# Altium PCB LinkIt Smart 7688 Duo.PcbDoc (part 2 of 3)
Units mil, origin at the board's own origin, x right, y up, seen from the top; angles counter-clockwise.
Board outline 2393.7 x 1023.62 mil, 4 copper layers (Top Layer, Mid Layer 1, Mid Layer 2, Bottom Layer), stack 40 mil thick; 184 components, 153 nets, 759 pads, 3026 vias.
Unrouted connection lines stored in the file: 1.
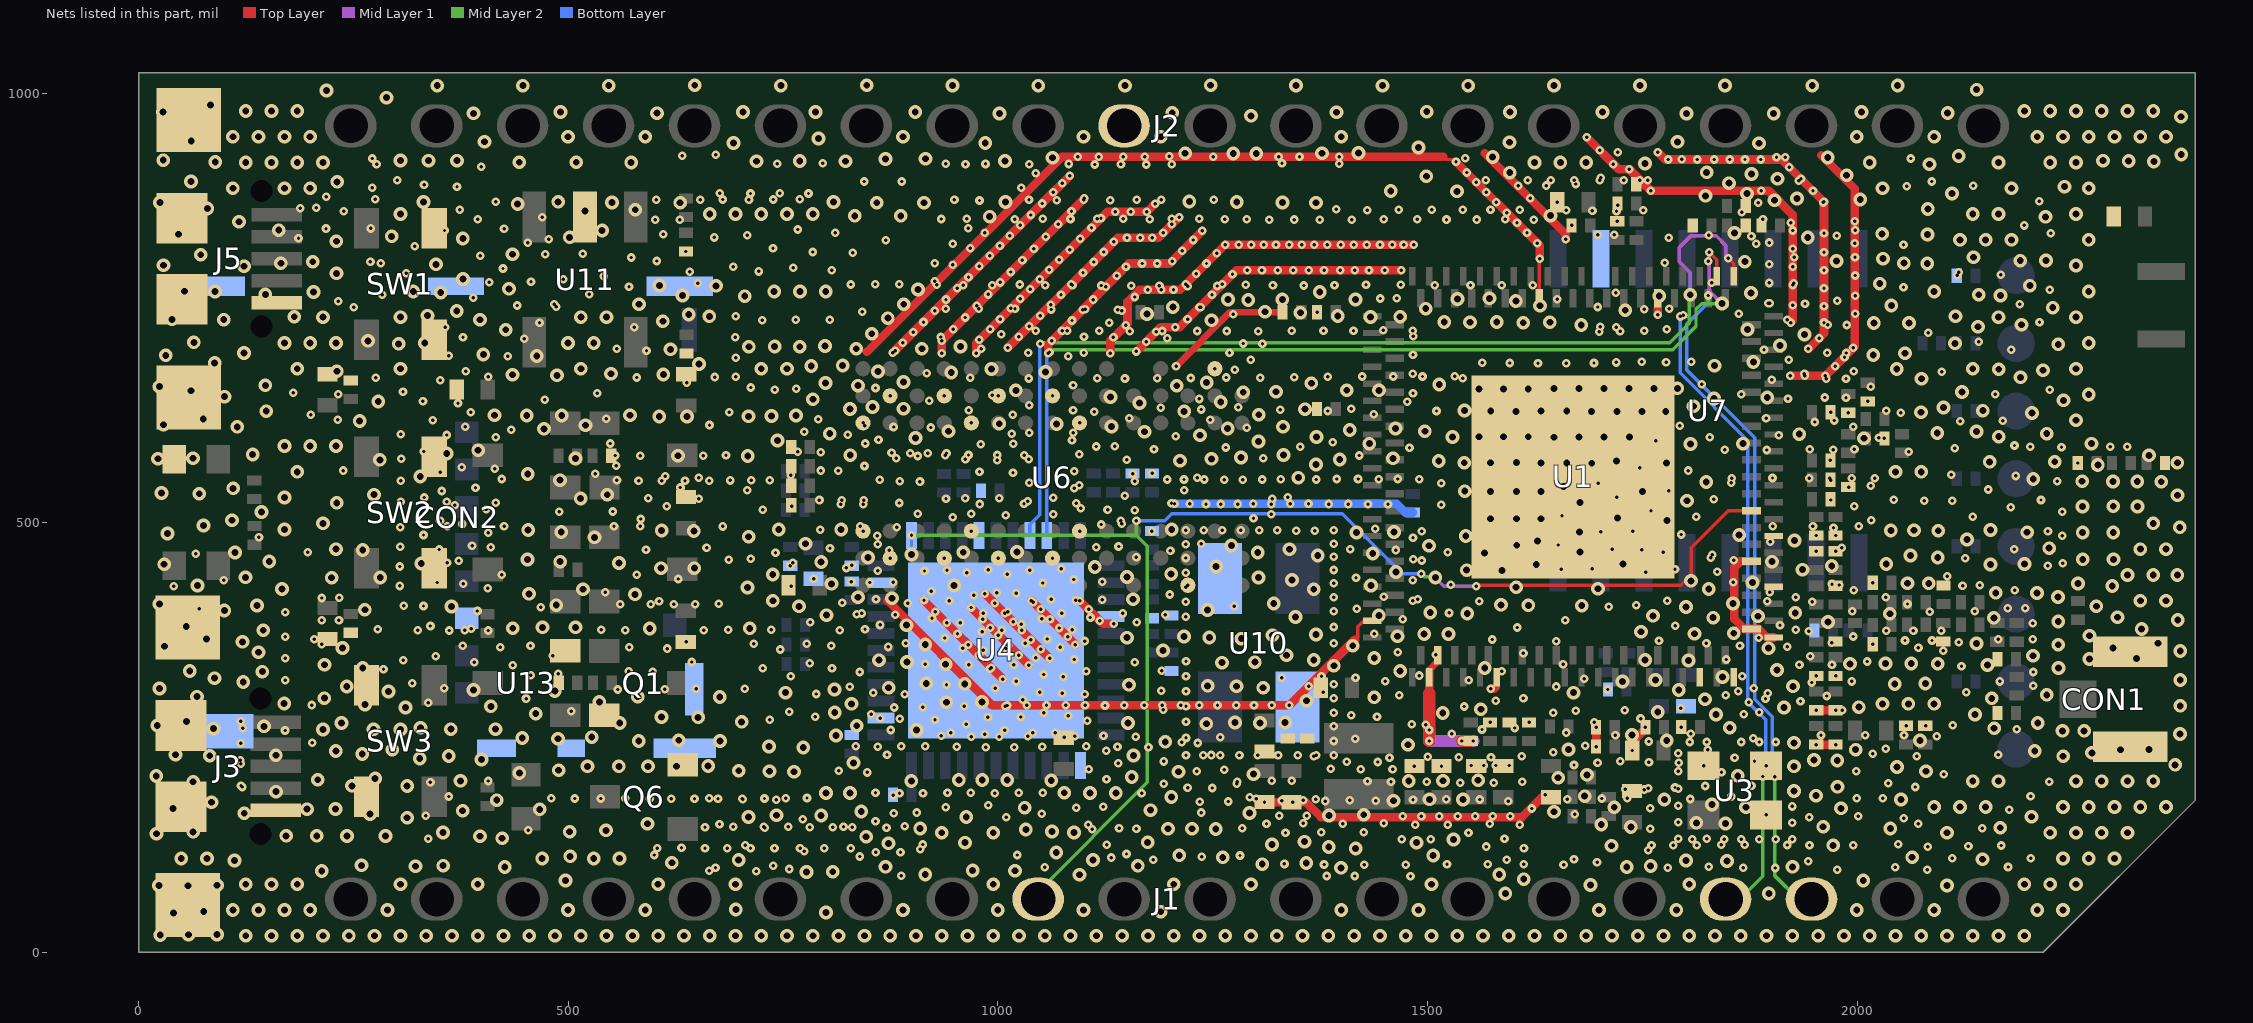
[diagram p4: the nets of this part, all layers, seen from the top]

## Via types
v1: diameter 10, hole 4, Mid Layer 2 to Bottom Layer, tented bottom, 916 vias
v2: diameter 10, hole 4, Top Layer to Mid Layer 1, tented top, 915 vias
v3: diameter 16, hole 8, Top Layer to Bottom Layer, tented both sides, 776 vias
v4: diameter 16, hole 8, Mid Layer 1 to Mid Layer 2, 419 vias

## Nets (pads, with @x,y where several pads share a name; then routed paths per layer and width w, separated by ;. In a path a pad name is that pad's centre, name@x,y a point inside that pad or via, vN(x,y) a via of type N, cw(c..) or ccw(c..) an arc to the next point about the centre after c; other vN are vias at no path point) (continued)
GND: C1.2 C2.2 C3.2 C4.2 C5.2 C7.2 C8.2 C9.2 C10.2 C11.2 C12.2 C13.1 C14.2 C15.1 C16.2 C17.2 C18.2 C19.2 C20.2 C21.2 C22.1 C23.2 C24.2 C25.2 C26.2 C27.2 C28.2 C29.2 C30.2 C33.2 C34.2 C39.2 C47.2 C49.2 C51.2 C52.2 C53.2 C54.2 C55.2 C56.2 C57.2 C58.2 C59.2 C60.2 C71.2 C72.2 C75.2 C76.2 C77.2 C78.2 C84.2 C85.2 C86.2 C87.2 C88.2 C89.2 C90.2 C91.2 C92.2 C93.2 C94.2 C95.2 C96.2 C97.2 C101.2 C102.2 C104.2 C105.2 C108.2 C109.2 C110.2 C179.2 C182.2 C183.2 C184.2 C189.2 C190.2 C191.1 C192.1 C193.2 C195.2 C197.2 C337.2 CON1.2 CON1.3 CON2.6 CON2.11 CON2.14 D2.2 J2.11 J3.5 J3.6 J3.7 J3.8 J3.9 J5.5 J5.6 J5.7 J5.8 J5.9 L32.1 Q1.3 Q6.3 R2.1 R3.1 R7.1 R8.2 R11.2 R13.1 R31.2 R32.2 R39.2 R52.1 R78.2 R83.1 R88.1 R89.1 R96.1 RC1.2 SW1.1 SW1.2 SW2.1 SW2.2 SW3.1 SW3.2 U1.1 U1.2 U1.7 U1.10 U1.13 U1.49 U1.63 U1.115 U1.120 U1.121 U1.128 U1.152 U1.156 U1.157 U3.2 U3.3 U3.4 U4.5 U4.15 U4.23 U4.35 U4.43 U4.45 U6.A3 U6.A7 U6.B2 U6.B8 U6.D2 U6.D8 U6.E3 U6.E7 U6.F2 U6.F8 U6.H2 U6.H8 U6.J3 U6.J7 U6.N1 U6.P9 U7.10 U10.2 U10.4 U11.2 U13.2 | length 6667.2
  Top Layer w4: v3@1415.75,363.58 1418.83,366.67 1418.83,379.07 U1.115@1425.79,386.02 ; 1521.16,922.62 1530.33,922.62 v2(1533.14,919.81) ; U1.63@1630.02,765.75 1630.02,806.8 v2(1630.51,807.28)
  Top Layer w8: v2(1207.28,681.89) 1270.28,744.88 C58.2@1331.3,744.88 ; U1.120@1501.58,328.01 1511.81,338.24 U1.121@1511.81,345.67
  Top Layer w10: 847.46,698.66 1074.43,925.62 v2(1093.11,925.62) v2(1397.24,925.62) 1518.16,925.62 ; 871.34,409.27 993.19,287.43 v2(1339.24,287.43) 1415.39,363.58 v3@1415.75,363.58 ; v2(877.56,697.64) v2(901.38,721.46) v2(926.57,746.65) v2(952.76,772.83) v2(978.35,798.43) v2(1002.36,822.44) v2(1025.98,846.06) v2(1064.37,884.45) v2(1075,895.08) v2(1083.46,903.54) ; v2(913.98,409.44) v2(1005.51,317.91) ; v2(934.74,696.95) v2(934.74,711.71) v2(1100.59,877.56) ; v2(968.81,401.27) v2(1036.02,334.06) ; v2(974.65,696.95) 974.65,709.01 1127.24,861.6 v2(1173.41,861.6) v2(1183.07,871.26) ; v2(984.76,417.4) v2(1060.24,341.93) ; v2(1011.51,703.44) v2(1111.42,803.35) 1139.67,831.6 1186.91,831.6 v2(1210.83,855.51) ; v2(1038.96,409.27) v2(1090.16,358.07) ; v2(1058.44,696.95) 1058.44,707.46 v2(1138.39,787.4) 1152.58,801.6 1199.83,801.6 v2(1237.8,839.57) ; v2(1094.96,409.27) 1121.95,382.28 v2(1134.84,382.28) ; v2(1130.93,696.95) 1130.93,711.69 1150.81,731.57 1150.81,756.85 1164.81,770.84 1211.98,770.84 v2(1264.76,823.62) v2(1484.06,823.62) ; v2(1161.18,699.22) 1189.32,727.36 1211.36,727.36 1277.62,793.62 v2(1469.45,793.62) ; C90.2@1310.24,174.8 1310.35,174.69 C89.2@1341.75,174.69 1358.64,174.69 1376,157.34 1609.9,157.34 1633.07,180.51 C72.2@1643.7,180.51 ; 1501.77,305.32 U1.120@1501.97,319.88 U1.120@1501.97,327.63 ; v2(1533.14,919.81) 1630.51,822.44 v2(1630.51,807.28) ; 1566.34,930.12 1660.63,835.83 v2(1660.63,829.92) ; v2(1573.62,306.69) 1577.36,306.69 1579.33,308.66 ; v2(1685.12,948.7) 1722.6,911.22 v2(1734.84,911.22) v2(1759.84,886.22) 1897.1,886.22 1925.14,858.18 1925.14,735.38 v2(1922.64,732.87) ; v2(1696.18,239.33) v2(1696.18,261.97) ; v2(1738.31,234.8) 1738.31,244.65 1753.46,259.8 v2(1753.46,261.97) ; v2(1767.72,741.93) 1767.72,749.61 ; v2(1768.11,931.1) 1776.57,922.64 1912.01,922.64 v2(1961.39,873.26) 1961.39,720.3 v2(1943.27,702.17) ; U1.10@1876.97,454.92 1864.17,454.92 1857.14,447.89 1857.14,387.81 1868.77,376.18 1885.3,376.18 1895.15,366.34 U1.1@1902.76,366.34 ; v2(1922.24,670.87) v2(1963,670.87) 1997.42,705.29 1997.42,888.41 1958.02,927.81 ; v2(1952.28,241.69) v2(1974.92,241.69) ; v2(1952.28,281.65) v2(1974.92,281.65)
  Top Layer w14: v2(1501.97,258.66) v2(1501.97,245.87) ; v2(1501.97,258.66) 1501.97,301.38 ; v2@1540.31,245.87 C88.2@1550.2,245.87
  Mid Layer 1 w14: v2(1501.97,258.66) v2(1501.97,245.87) v2(1553.35,245.87)
  Bottom Layer w10: v1(1205.51,521.85) 1464.1,521.85 1474.14,511.81 C55.2@1482.68,511.81
  other v1: 1480.12,88.58 1382.87,88.78 1415.16,88.78 718.5,94.29 664.17,94.88 757.09,96.85 1054.33,98.82 1592.32,107.48 1670.47,108.07 2202.17,109.25 1149.61,114.37 857.87,116.54 886.61,116.34 603.54,121.26 631.69,121.46 659.06,121.26 684.84,121.26 712.01,121.26 739.96,121.26 769.68,121.26 797.64,121.06 828.54,121.06 1612.2,120.87 1568.11,123.03 2082.09,122.83 2129.53,123.43 1760.63,124.41 1786.02,124.41 1813.39,124.41 1944.49,124.61 1995.67,124.41 2167.91,124.21 912.4,125.39 1126.57,125 1841.93,125 1869.09,125.2 1918.7,124.8 2047.83,125.59 1503.94,131.3 337.01,132.09 1470.08,131.69 1589.57,132.09 1334.65,138.98 1547.64,139.17 1376.38,139.76 1425.79,139.76 453.54,141.85 1140.94,144.29 1284.45,144.09 2145.67,144.09 781.1,145.47 830.32,145.47 659.06,145.67 691.73,145.87 727.36,146.06 755.91,145.87 807.68,145.67 891.73,146.65 1105.12,148.23 1485.63,148.62 1523.62,148.62 1607.09,148.43 1312.6,149.61 1401.38,149.41 1572.44,149.41 2071.06,149.41 1355.51,150 1448.82,150 857.48,152.56 1009.65,157.28 334.25,158.66 1671.26,160.43 1050.79,161.42 878.74,161.81 905.51,162.6 1091.34,168.11 939.37,168.7 1122.64,169.49 988.78,170.87 1235.04,175.24 1268.07,175.43 1330.12,176.57 1381.1,175.98 1439.76,176.38 1594.09,175.79 1355.51,176.77 1409.45,176.97 1483.07,177.36 594.68,178.54 1521.85,177.95 1560.63,177.76 1662.8,178.15 1805.71,178.35 480.12,179.13 507.68,178.94 537.6,178.94 566.14,179.13 619.68,178.74 646.85,178.74 674.21,178.74 702.36,178.74 728.35,178.94 752.95,179.33 777.76,179.53 1300.79,178.74 1702.56,178.94 1732.48,179.13 1999.41,179.33 360.83,181.3 1853.54,181.3 2201.77,181.69 877.95,182.68 1220.67,191.54 1249.41,191.14 1756.69,190.75 120.63,192.32 1787.99,191.73 1823.23,193.5 1876.97,193.9 1193.11,196.06 1537.99,197.44 1577.17,197.44 2036.02,196.85 339.57,198.03 1278.35,198.23 1457.48,198.43 1499.21,198.23 1610.04,198.43 2223.62,198.23 407.01,199.33 1318.9,199.41 1342.13,199.41 1430.12,199.21 1126.38,201.57 848.03,209.25 1231.5,210.63 1842.13,209.65 814.57,211.22 1999.02,210.83 1263.19,212.4 1105.51,212.99 1670.47,217.91 1140.16,219.88 1792.13,220.47 1697.83,220.67 1757.68,221.06 1193.11,222.05 1724.21,222.44 1880.51,222.24 118.11,223.54 1455.75,226.26 1857.28,226.18 1500,227.56 1536.42,227.17 1573.82,226.77 1609.45,228.35 2069.49,227.95 1218.9,229.33 1238.98,229.33 1258.66,229.33 1281.1,229.33 1302.56,229.33 1325.98,229.33 1349.02,229.33 1370.28,229.33 1390.75,229.33 870.87,229.92 1646.06,232.68 1125.98,234.45 1825.98,235.83 2033.07,236.61 1683.46,240.55 1757.48,245.28 1390.75,245.87 1415.75,248.43 1218.9,249.41 1878.94,249.21 1089.17,251.57 2092.72,251.18 1718.7,252.36 1957.87,252.36 2009.45,252.56 2054.53,252.36 984.84,253.94 1528.35,254.53 1806.5,254.13 944.88,255.32 1040.35,255.51 1066.54,255.51 1661.61,255.71 170.32,258.11 1007.68,258.46 1563.39,259.25 120.98,260.83 1601.38,261.02 1390.75,262.8 963.19,265.35 1498.03,264.76 1218.9,268.11 1694.09,267.91 1103.74,269.29 734.65,270.47 926.77,270.47 863.19,272.24 885.83,271.85 1747.87,272.01 988.39,273.43 1026.57,273.82 1441.14,274.02 1081.69,275.39 1411.02,275.98 1868.11,276.77 1053.15,278.54 1390.75,278.94 1646.26,278.74 756.89,279.92 503.35,280.71 1672.64,280.91 1192.32,282.09 1729.33,281.69 1982.48,281.69 1794.45,283.86 912.6,285.24 960.83,286.42 1008.46,286.22 1218.9,286.22 1542.72,286.02 337.01,290.16 1579.33,292.91 1029.13,293.7 1611.61,295.47 1390.75,295.67 1964.37,298.23 1467.13,299.21 1846.85,299.02 891.73,300.39 1101.18,300.39 1075,301.57 1895.71,301.22 1048.82,302.56 1189.96,304.53 1218.9,303.94 557.64,305.83 612.09,306.02 1709.84,305.83 355.75,307.24 648.94,306.65 705.43,306.85 997.05,307.48 1649.8,309.25 1390.75,311.81 1947.24,313.98 1021.46,315.16 1450.59,315.55 1993.5,315.16 1548.03,316.54 170.51,316.77 1682.48,318.31 1330.32,319.49 1416.14,319.49 1076.18,320.47 1218.9,321.06 1490.16,322.05 1053.15,323.23 1102.56,326.97 1190.55,327.56 1586.42,327.17 990.75,329.72 1018.5,334.45 965.94,334.65 1657.68,335.04 1970.67,334.65 1159.45,337.6 1218.9,338.78 1088.98,340.75 1847.44,340.75 170.71,342.09 1044.09,342.52 1945.59,344.72 1509.45,346.26 1611.61,348.03 1465.55,349.02 982.68,351.57 1009.25,353.54 958.86,353.94 1072.44,354.72 213.23,358.66 1031.69,359.65 1390.75,359.65 1824.61,359.84 1101.18,362.2 1649.8,361.81 1769.37,362.32 1057.28,364.57 1575.2,363.98 2164.17,364.37 937.99,365.75 170.51,367.17 1437.8,370.67 981.5,372.83 1943.43,373.62 407.01,374.45 815.75,374.61 2033.66,374.21 2065.51,374.02 2097.95,374.02 379.65,374.65 538.39,375.28 566.34,374.88 657.64,374.88 686.18,375.28 736.38,375.28 1004.53,375 1086.61,375.2 1390.75,378.54 1604.53,377.95 339.57,379.72 1788.19,380.12 1027.17,381.5 1910.16,380.75 956.1,383.27 1161.61,384.25 213.03,386.42 233.07,386.22 1660.43,386.61 1471.26,387.6 1051.18,387.99 923.23,388.78 1107.68,389.57 1218.7,390.55 835.83,393.5 1194.68,392.91 1074.41,394.29 1145.47,394.29 982.68,394.68 1525,394.88 170.51,395.71 1011.42,396.06 2084.29,396.18 394.25,397.13 1390.75,396.65 1994.25,396.77 2137.01,397.05 70.51,399.76 1417.52,400 1275,402.56 308.39,403.23 331.46,402.99 560.24,405.04 596.1,405.04 622.8,405.24 647.91,405.24 674.84,405.43 2058.58,405.32 895.28,406.1 1040.94,407.48 1218.7,407.87 1895.32,408.46 1947.95,408.07 943.31,409.25 1090.75,409.45 1560.24,408.66 1778.86,409.29 1488.39,410.63 1061.81,410.83 213.23,412.32 233.27,412.52 1390.75,412.99 2033.27,412.99 1449.02,413.98 971.65,415.35 1200,416.34 998.62,418.31 1021.26,417.91 543.03,419.02 922.64,420.08 406.38,423.46 1218.7,424.8 40.94,426.1 303.94,426.3 1526.97,427.56 1979.02,427.44 1390.75,429.53 850.79,430.32 878.35,430.51 1052.17,429.72 829.53,431.1 99.06,432.76 628.07,434.41 1088.39,433.86 785.43,434.65 1416.73,435.83 422.56,439.45 579.49,439.45 1011.02,440.16 963.58,441.93 1218.7,441.73 914.57,443.7 940.75,444.49 988.78,445.28 1036.81,444.68 1390.75,444.88 1073.82,446.46 303.74,448.98 758.27,449.61 830.12,450.39 2221.65,450 359.02,453.43 1493.11,455.91 686.77,456.65 1218.7,458.86 1829.68,459.29 1161.22,459.65 1390.75,460.24 66.26,463.74 1523.62,465.55 1200.79,467.13 590.43,468.39 873.62,467.72 1462.99,468.11 1410.04,469.09 1982.2,470.59 409.61,471.46 660.87,470.83 1114.57,471.26 304.33,472.05 1140.35,472.24 1218.7,474.8 1390.75,475.59 139.96,482.99 859.45,484.84 1179.13,490.16 1493.31,490.16 2222.05,489.76 1218.7,490.94 1239.76,491.14 1261.22,491.14 1282.48,491.14 1303.94,490.94 1325.2,490.94 1347.05,490.75 1368.9,490.75 1390.75,490.94 793.11,491.93 1439.17,493.11 304.53,494.53 882.28,494.49 1972.48,494.13 679.92,495.55 359.02,495.94 425.2,495.75 553.15,495.94 583.94,495.75 839.57,495.87 1901.65,495.75 1948.54,495.75 2001.97,495.75 1120.47,497.83 1144.29,498.62 1430.71,521.46 1453.94,521.26 1515.75,520.67 978.74,521.65 1091.14,522.44 1223.03,521.85 1242.13,521.65 1259.45,521.65 1279.33,521.65 1297.24,521.85 1318.11,521.65 1340.35,521.85 1361.42,521.85 1385.04,521.65 1407.68,521.65 415.47,523.07 305.16,524.09 358.39,524.29 1034.65,524.8 792.28,526.3 818.31,526.02 844.02,526.1 1088.98,539.96 1036.22,546.26 1515.75,545.67 304.96,548.58 885.63,548.23 909.25,547.83 556.61,549.37 581.73,548.98 608.86,548.78 635.79,548.78 663.9,548.98 688.62,549.09 712.91,549.29 734.37,549.29 862.6,550 1196.85,550.2 1216.54,550.2 1240.16,550.2 1263.58,550 1284.84,550 1307.48,550.2 1329.13,550.59 1370.47,550.2 1443.31,550.59 1490.55,550.39 1394.09,550.79 1419.09,550.79 1465.55,550.79 1853.98,551.54 1967.95,551.54 1993.66,551.54 1901.46,551.93 1944.21,551.73 2020.28,551.73 531.3,556.69 1156.69,557.09 1179.53,557.28 1017.52,558.07 978.54,559.25 793.7,560.63 814.37,560.43 1088.78,560.04 414.49,562.76 844.68,565.94 999.17,572.48 1035.83,573.62 1150,573.43 305.35,574.49 962.2,573.82 1308.74,575.12 554.8,578.15 583.54,577.72 657.24,577.95 683.54,578.35 1420.32,578.15 1094.49,579.72 876.18,581.5 897.83,580.71 918.31,580.71 940.16,580.91 767.17,582.6 793.7,581.69 2060.24,582.48 1894.92,584.57 1181.61,585.24 1845.83,585 1944.61,585.39 1972.28,585 1996.85,585.43 1265.04,587.44 1479.02,587.24 1114.37,588.58 1351.89,588.46 2201.38,588.39 1136.02,588.78 979.96,591.3 1017.91,591.93 1389.53,593.74 861.02,596.65 415.71,599.21 1828.23,599.41 2025,598.82 1206.89,600.39 304.76,602.64 1908.58,601.81 1036.42,604.53 1087.6,604.72 774.65,605.67 1289.72,610.55 878.5,611.34 921.65,610.75 1995.28,611.81 664.33,613.58 844.88,612.8 1950.59,617.13 1973.43,618.9 231.85,619.65 790.75,620.47 1247.2,619.84 544.25,620.87 1152.87,621.46 1893.94,621.57 1017.32,625.39 200.47,625.71 1437.4,625.98 386.34,628.54 687.4,628.35 1112.17,629.17 1383.86,629.92 1510.43,629.92 2033.86,630.32 965.94,630.71 1087.4,630.71 1328.78,631.57 1410.98,632.4 1189.68,633.62 1279.8,634.41 1036.22,636.81 1476.18,640.55 920.28,641.73 1234.45,643.94 1919.49,644.29 1987.01,645.47 1962.2,645.67 993.5,648.39 232.05,649.41 1865.04,649.49 179.84,651.22 857.48,656.69 2015.75,658.27 1087.4,659.84 1900.67,666.5 1963.78,667.32 1987.01,667.52 967.6,668.43 1035.63,667.72 1115.55,668.11 1147.83,667.72 1185.24,667.91 1224.61,668.31 579.53,668.9 670.59,669.45 1265.55,668.9 1305.32,668.7 1344.88,669.09 406.77,669.65 694.88,669.68 1383.86,669.88 1423.82,670.08 1459.84,670.08 1494.09,670.08 1531.5,670.28 1938.66,673.43 917.01,673.9 1920.28,689.57 694.88,691.73 429.45,693.54 1035.24,697.64 1987.32,697.4 1965.35,697.8 591.02,700.24 880.71,700.2 1891.54,700.98 556.22,702.44 980.55,702.44 448.5,714.21 694.49,715.94 933.39,716.02 1003.74,719.09 1700,722.05 1044.09,723.23 1080.91,723.43 1118.11,723.23 1153.35,722.83 1191.14,723.03 1232.09,723.03 1266.54,723.03 1303.15,722.83 1341.93,723.23 1378.94,723.43 1413.78,723.43 1482.68,723.43 1724.02,722.83 1751.97,723.43 1448.43,723.82 1778.54,725 356.57,727.56 576.65,727.56 1965.79,730.24 1987.72,730.04 466.5,732.6 2212.2,733.27 725.59,735.63 764.57,736.02 804.13,736.02 1918.86,735.98 694.68,740.16 1862.4,742.91 842.13,745.67 1139.37,747.64 1062.01,748.03 1101.38,748.23 1752.13,748.43 939.37,749.02 977.56,748.82 1019.88,748.82 1781.1,748.82 485.94,751.26 1235.83,750.79 1698.23,750.98 2189.37,754.13 1898.31,755.16 1939.25,754.76 232.28,757.72 1976.65,758.35 1650.79,760.04 389.57,761.57 1718.9,767.72 2224.02,770.87 1220.67,775.2 1255.32,775.39 959.84,776.18 993.31,776.18 1055.12,776.18 1086.81,776.18 1120.47,775.98 1154.92,775.79 1187.99,775.79 1320.08,776.18 1356.1,775.98 1391.73,776.38 1508.27,776.38 1550,776.38 1586.22,776.18 1622.64,776.38 828.94,777.17 857.24,777.56 885.24,777.36 928.94,776.77 1025.59,777.17 1288.58,776.77 1428.35,776.77 1468.9,776.77 650.75,778.39 1926.38,778.5 1830.91,779.33 408.19,779.8 2116.54,787.8 423.98,795.79 1776.18,802.48 269.72,803.46 1826.77,804.33 1926.57,808.98 397.28,810.75 1882.52,824.72 452.95,825.94 477.44,829.8 185.94,830.83 1780.71,831.5 1827.24,834.53 1976.26,833.74 1698.23,834.84 1717.32,834.84 2225.39,836.81 270.12,842.36 425.2,841.93 2194.68,845.87 1922.83,848.98 1997.24,850.94 601.34,852.48 1315.75,852.56 1374.61,852.56 1411.81,852.56 1623.82,852.56 394.68,852.95 629.88,852.68 933.86,853.35 963.58,853.54 1019.68,852.95 1052.17,853.54 1084.45,853.35 1176.77,852.95 1234.45,853.54 1263.98,853.15 1289.37,852.95 1345.08,852.76 1449.02,853.15 1487.8,853.15 1522.05,852.76 1557.48,852.76 1590.55,852.95 1890.35,853.11 1115.55,853.74 1146.06,853.74 1202.36,853.74 469.76,855.32 1865.55,861.22 1719.88,862.4 1661.61,863.39 1691.93,862.8 1750.98,863.39 1393.5,864.57 1429.72,863.78 1466.34,864.17 1504.92,864.17 1540.75,864.17 1573.23,864.17 1607.48,864.17 187.99,865.87 1960.43,872.64 415.35,873.5 2211.81,874.02 653.74,875.55 978.54,874.92 1068.35,875.39 1099.72,875.55 1130.91,875.39 1161.65,875.55 1190,875.55 1251.3,875.55 275.2,876.18 602.28,875.71 679.68,876.06 710.24,875.91 738.74,876.06 769.49,876.22 949.41,875.91 1036.18,875.71 218.11,879.41 2057.87,891.73 2135.24,891.93 2086.81,897.05 1567.52,898.62 1616.73,898.62 1643.5,898.43 1670.67,898.62 1700.59,898.43 1728.35,898.62 1756.1,898.62 1932.09,897.83 276.81,917.05 962.28,917.13 985.55,917.44 1036.5,917.28 1082.2,917.44 1112.44,916.81 1143.19,917.13 1172.8,916.81 1202.4,916.97 1397.13,917.6 743.39,917.76 795.91,918.39 939.37,917.91 1330.59,918.23 1543.7,924.02 2062.2,923.82 1916.34,925.39 632.48,926.97 671.65,928.15 1721.26,931.3
  other v2: 887.6,88.98 1976.77,96.06 2081.69,95.87 671.26,98.43 1779.33,98.23 1867.32,98.43 1904.72,98.03 1827.36,99.41 2044.09,98.82 2175.59,99.21 738.39,100.59 1379.53,102.17 1426.38,101.77 1474.41,101.77 1522.64,102.56 1569.88,102.36 1612.01,102.36 1658.27,101.97 1333.46,102.76 1697.24,104.53 1943.11,106.1 1180.91,107.48 2110.83,109.45 1131.89,110.24 839.37,111.42 1237.01,111.02 1281.69,112.6 599.8,113.19 1022.44,113.19 774.61,117.52 1756.69,118.7 909.45,120.08 706.1,124.41 1791.93,131.89 1808.27,131.69 1824.8,131.89 1845.47,131.69 1865.16,131.69 1886.02,131.69 1905.31,131.69 1924.21,131.69 1109.84,143.31 1759.25,143.5 1161.22,143.7 728.54,144.68 870.28,145.08 820.28,145.87 675.98,149.02 1924.41,150.59 1791.93,151.38 773.03,154.92 2054.13,155.91 1944.29,156.89 1471.26,158.46 1492.91,158.46 1513.39,158.27 1535.24,158.27 1555.32,158.27 1575.79,158.27 1596.26,158.46 2001.18,158.46 1327.17,158.66 1359.25,158.86 1894.09,159.84 1236.81,162.6 2176.97,165.94 1621.46,167.32 1759.06,167.52 1791.93,170.47 1924.41,169.68 1310.24,174.41 1343.31,174.41 741.93,177.36 703.15,178.15 1369.68,177.95 663.98,179.13 2029.72,179.13 1292.91,180.51 1637.01,183.07 857.48,185.43 885.43,185.04 912.8,185.04 941.34,185.43 968.31,185.43 996.26,185.04 1024.21,185.43 1052.36,185.43 1167.13,185.04 1730.32,189.57 1751.97,189.37 1791.93,190.35 2067.72,192.32 119.06,193.78 1277.95,196.06 2100.59,207.09 1791.93,210.63 1387.2,213.39 1422.44,212.99 1459.25,212.99 1484.76,216.69 1516.26,216.69 1550.98,217.32 1565.55,217.32 1579.33,217.32 1594.88,217.32 1821.26,216.93 1894.09,216.93 118.74,219.57 1442.13,221.46 1406.1,221.65 1367.72,228.35 1248.23,229.53 2164.17,229.92 2018.11,231.1 1791.93,231.69 985.63,238.39 1175.2,238.58 860.04,239.37 951.97,238.98 1019.09,238.78 1051.38,239.17 1102.56,239.57 1139.17,239.17 834.45,239.96 887.4,239.96 915.35,239.96 118.58,243.46 1232.48,243.5 202.01,243.94 1213.78,244.49 1804.92,244.68 1825,244.68 1865.16,244.68 1886.02,244.68 1905.31,244.68 1539.96,245.87 1001.57,250.59 1076.97,250.2 1258.66,250.2 969.09,250.79 1034.65,251.18 1160.43,250.98 934.06,251.77 1122.83,251.77 875.39,258.66 2185.63,259.45 1795.08,262.01 2057.09,263.58 2079.92,263.78 2111.02,264.17 1481.69,265.55 1572.83,267.52 1618.11,267.52 118.74,268.62 787.2,274.02 852.56,277.17 1885.83,279.13 879.53,284.84 1011.02,287.2 1033.46,287.43 1056.5,287.43 1078.74,287.4 1101.38,287.4 1124.61,287.2 1147.05,287.43 1170.08,287.4 1191.14,287.6 1212.8,287.6 1234.45,287.6 1255.51,287.4 1277.17,287.4 1298.03,287.4 1318.5,287.43 201.22,287.72 1873.62,290.75 1934.06,292.32 450.79,295.28 1893.31,294.88 788.39,300.59 854.92,301.97 1378.54,302.56 2127.17,302.76 1861.81,303.74 1879.72,307.28 827.36,309.06 1361.81,309.65 2204.72,310.24 940.16,311.42 318.31,313.31 2166.14,315.16 759.06,321.06 1376.57,321.26 1866.14,321.46 1952.28,321.61 1974.92,321.61 456.1,322.44 488.15,324.17 598.15,326.42 838.98,326.18 2204.92,326.18 570.47,326.89 284.92,329.53 726.18,330.51 806.89,330.51 992.13,331.3 2121.46,332.87 435.43,334.21 1932.83,334.37 915.55,335.43 780.91,336.22 390.71,337.72 643.66,337.8 2011.61,338.39 307.8,339.65 345.63,344.49 481.89,344.88 977.95,345.47 1024.21,345.47 2100.2,350.79 746.85,352.36 1049.8,352.56 615.16,353.46 2071.34,354.25 420.79,355.08 570.79,354.76 872.44,355.32 1918.86,355.51 377.17,356.5 455.98,356.81 806.1,356.69 1012.01,357.09 1863.58,356.69 965.35,358.07 2018.11,358.43 715.94,359.06 777.36,359.06 892.72,359.45 1970.47,360.24 637.13,361.18 2118.11,361.02 2055.63,362.83 2087.09,362.83 204.53,364.33 1038.39,363.78 2204.53,364.37 1885.24,365.94 1081.1,367.32 1995.43,367.48 1000.59,368.9 952.95,370.47 361.22,374.49 1027.56,374.61 324.76,374.96 1928.58,375.43 278.11,375.94 387.2,376.57 845.28,375.79 1071.26,377.36 991.14,377.76 862.8,380.91 940.35,383.27 2204.53,382.87 781.5,384.25 1017.91,384.65 1118.7,386.02 982.09,387.4 1060.63,387.6 880.32,392.91 841.54,394.29 1007.87,394.68 927.17,396.26 1049.8,399.02 1105.91,399.21 2175.2,400.59 2195.67,400.39 467.91,401.42 1711.02,402.17 1743.11,403.74 996.06,406.1 818.7,406.89 605.59,408.46 1482.68,409.25 1121.46,410.24 858.07,410.83 1928.46,413.23 1898.23,418.9 1995.87,421.42 2183.46,421.46 759.45,425.79 1220.98,427.13 2122.64,426.77 2142.72,427.17 1970.67,428.54 377.83,428.94 347.64,430.32 1855.94,430.51 2018.11,429.96 1121.46,431.3 1482.87,432.87 2104.72,437.6 1753.94,442.13 1837.05,442.8 860.24,443.9 1655.67,445.87 1691.73,446.26 1787.99,445.67 823.23,447.24 761.02,453.35 2239.17,452.76 372.44,455.51 1856.14,456.14 1483.46,457.48 712.4,458.07 874.53,458.62 937.52,458.62 1000.51,458.62 1063.5,458.62 2125.79,458.46 1831.5,462.4 196.77,465.55 741.14,465.16 1774.41,465.75 1952.28,466.69 1974.92,466.69 1749.09,468.43 349.61,468.7 1714.76,468.9 2182.68,468.9 804.53,470.28 387.95,473.07 1652.32,473.98 860.04,474.8 1236.81,475.59 1899.02,477.76 1483.07,482.28 331.46,485.63 1952.28,485 1974.92,485 2238.78,484.84 1795.28,486.22 407.01,488.23 1701.57,489.61 843.03,490.12 969.02,490.12 1095,490.12 1738.78,489.96 376.77,498.43 350.71,502.05 1143.11,501.97 2016.54,502.76 584.13,504.25 1297.44,505.32 947.24,506.3 1812.8,506.69 2134.45,506.69 1656.46,507.8 1008.86,508.66 906.5,510.43 969.09,510.43 1064.17,509.84 1318.11,509.65 489.37,512.8 551.85,512.95 1760.04,513.58 2238.58,512.8 1159.06,514.57 726.18,514.96 1127.56,514.96 404.57,515.79 1096.46,516.54 2178.74,518.11 614.53,519.02 760.04,518.9 1996.65,519.09 367.91,520.24 816.93,521.46 843.11,521.46 1030.32,522.05 1201.97,522.64 885.24,522.83 2078.15,525.59 2110.83,525.59 1969.49,526.38 2213.98,526.38 1319.29,527.56 1832.87,527.36 2042.52,526.77 592.83,528.15 651.65,527.91 939.57,527.76 961.81,528.54 1001.57,528.54 332.24,529.25 1064.17,529.13 1337.4,529.33 1720.39,529.57 1147.44,531.5 352.72,536.85 1780.51,537.01 708.27,537.8 1216.93,537.8 2152.36,538.58 392.01,540.67 630.51,540.91 1990.16,541.14 2015.75,542.72 1094.49,543.7 1698.82,545.98 1853.35,546.65 1159.45,548.03 2232.87,548.03 1969.49,549.41 422.56,550.79 651.81,552.13 1231.89,552.17 612.87,554.06 2184.65,554.33 758.86,554.92 2109.65,555.71 351.18,558.66 238.19,560.63 1803.54,560.63 376.18,564.37 1746.89,563.82 555.71,566.18 2256.75,569.39 1968.9,572.83 881.69,574.8 906.69,577.56 938.78,578.54 1030.71,578.54 965.75,578.74 999.02,578.74 331.89,582.8 2113.78,586.42 2237.8,587.8 2294.49,588.19 2314.17,588.19 2183.07,589.76 548.62,592.13 845.67,592.13 1765.71,595.28 1086.22,595.67 2031.69,598.03 358.66,601.97 825.39,602.36 1016.14,603.35 433.35,608.07 380.08,611.73 1793.62,612.87 843.03,616.1 969.02,616.1 1095,616.1 2119.88,617.91 2169.29,618.5 342.2,619.25 1969.09,628.54 1989.57,627.95 2050.79,627.95 1236.81,631.69 371.57,639.09 330.83,641.34 2012.2,641.14 472.52,642.8 874.53,647.6 937.52,647.6 1000.51,647.6 1063.5,647.6 2160.63,649.61 533.46,650.59 1483.07,650.79 307.6,652.44 740.16,654.72 2224.02,654.72 765.16,655.91 712.4,657.28 1819.29,661.22 637.6,662.8 350.98,665.55 275.98,668.62 1540.94,668.11 1938.78,670.87 1482.68,673.43 380.47,676.14 1995.87,675.98 2098.23,675.79 1275.59,677.76 1252.48,679.09 1974.61,682.09 1628.54,685.43 1661.22,685.63 1563.58,686.22 1595.67,685.83 1693.7,685.83 1719.68,686.42 1777.56,686.61 1749.41,687.01 1807.09,687.4 1294.29,689.76 1985.24,692.72 360.63,694.09 1081.69,693.7 1483.07,695.28 1269.49,697.64 1100,697.83 2179.33,701.38 1995.67,703.54 1285.63,708.46 1307.87,708.07 889.17,709.25 1172.44,710.48 2141.34,710.43 1062.8,711.81 978.35,712.7 1197.24,714.57 377.44,715.63 1955.86,714.76 1024.21,716.14 1100.2,716.34 1134.45,715.75 1483.46,716.73 2082.68,721.06 1184.25,722.29 1074.61,723.23 948.03,725 990.84,725.2 1206.3,727.36 1719.49,727.36 1036.61,728.54 1700.79,727.95 1148.77,729.53 1129.53,732.48 913.39,733.46 1961.42,732.87 1086.22,735.24 1002.46,736.81 1220.67,736.67 961.81,738.78 1049.02,740.75 1797.64,741.34 1274.02,742.72 1997.64,742.91 1371.46,744.88 1144.09,746.85 1098.82,747.83 1015.05,749.41 1234.59,750.59 250.08,750.83 975.2,752.17 1961.42,751.97 440.59,752.68 1061.61,753.54 1925.2,753.15 483.5,754.09 1896.65,755.12 939.57,759.65 1026.08,760.43 1110.83,759.65 1445.08,760.83 1464.17,761.22 1159.06,762.6 1997.64,763.98 283.5,765 524.21,765.63 988.58,765.55 1073.43,765.16 1249.16,765.16 1174.41,771.06 1189.96,770.84 1204.33,770.84 1037.4,771.76 1961.42,772.64 570.59,774.53 1125.59,774.61 2053.94,774.02 1925.14,776.57 1085.43,777.36 1218.7,777.56 1261.22,777.22 1002.56,779.53 1897.44,778.94 456.57,780.2 926.38,780.91 494.06,783.43 1048.82,783.17 965.75,785.63 541.02,786.69 1997.64,787.6 2167.13,788.39 1230.71,789.57 1272.98,788.98 311.61,790.32 1099.02,790.94 2118.11,791.34 641.22,792.13 721.85,792.32 1014.76,791.73 806.69,793.5 1290.16,793.62 1307.28,793.62 1325.59,793.62 1343.5,793.62 1361.81,793.62 1379.53,793.62 1398.23,793.62 1415.16,793.62 1431.89,793.62 1450.39,793.62 1059.84,794.2 1961.39,793.7 691.73,797.64 761.61,796.85 1149.02,798.03 1925.14,797.83 947.24,800 1897.64,800.59 1167.72,801.6 1185.63,801.6 1242.72,801.57 281.65,801.65 926.38,801.97 602.76,804.49 1202.76,804.33 1028.54,805.51 1071.46,805.81 573.43,808.54 1997.44,808.66 990.35,810.43 473.39,812.4 516.73,812.99 1254.53,813.39 830.91,814.17 636.81,815.55 784.45,814.96 1123.03,814.96 1961.42,814.76 1214.57,816.34 1083.46,817.82 738.19,819.49 967.91,819.49 1041.93,818.9 1925.14,818.7 321.14,821.69 1280.12,823.62 1294.68,823.62 1309.25,823.62 1323.62,823.62 1338.98,823.62 1353.54,823.62 1368.11,823.62 1383.46,823.62 1398.82,823.62 1413.98,823.62 1429.33,823.62 1444.68,823.62 1459.06,823.62 1472.05,823.62 2053.94,823.62 947.24,824.8 1627.56,825.39 1997.42,825 1897.83,825.98 1134.84,826.77 869.49,828.54 1227.17,828.94 1095.96,830.32 1150.2,831.6 1165.75,831.6 1179.72,831.6 669.68,831.89 1055.71,832.68 1876.97,833.27 708.46,834.45 1013.78,833.86 610.47,835.67 810.83,837.4 984.45,837.2 1192.52,837.2 1615.75,837.2 1961.39,836.81 355.91,839.96 1925.14,839.96 1997.64,840.35 766.93,841.14 217.95,842.28 965.35,842.72 1108.86,843.21 1667.72,845.87 1070.08,847.05 1202.36,847.05 1604.13,848.82 1720.67,850.79 1119.98,854.33 1037.99,858.07 1592.32,860.63 1136.42,861.6 1154.53,861.6 238.78,862.24 1085.63,862.6 373.78,864.21 206.77,866.34 1721.26,869.29 1051.57,871.46 1884.65,872.24 1579.92,873.03 1650.98,872.83 1619.29,877.76 676.38,883.46 712.01,883.07 746.26,883.46 779.53,883.07 1568.31,884.65 1888.58,886.22 1948.62,886.02 1027.36,889.53 272.01,889.72 370.47,891.14 1605.51,891.93 1637.99,892.32 332.09,893.23 1672.44,894.09 1556.89,896.06 844.29,897.01 888.03,897.01 300.91,898.35 1746.85,898.23 1934.65,900 1701.77,901.38 1044.17,906.77 1545.47,907.48 398.66,914.25 1920.87,913.78 1715.94,917.32 1780.12,922.64 1813.78,922.64 1833.86,922.64 1851.57,922.64 1869.49,922.64 1887.8,922.64 1795.67,922.83 271.81,923.78 1906.1,925.2 1117.52,925.98 1146.06,925.98 1171.06,925.98 1199.21,926.18 1250.39,925.98 1326.57,925.98 1350.98,925.98 1700.2,933.27
  other v3: 124.57,19.14 154.57,19.14 184.57,19.14 214.57,19.14 244.57,19.14 274.57,19.14 304.57,19.14 334.57,19.14 364.57,19.14 394.57,19.14 424.57,19.14 454.57,19.14 484.57,19.14 514.57,19.14 544.57,19.14 574.57,19.14 604.57,19.14 634.57,19.14 664.57,19.14 694.57,19.14 724.57,19.14 754.57,19.14 784.57,19.14 814.57,19.14 844.57,19.14 874.57,19.14 904.57,19.14 934.57,19.14 964.57,19.14 994.57,19.14 1024.57,19.14 1054.57,19.14 1084.57,19.14 1114.57,19.14 1144.57,19.14 1174.57,19.14 1204.57,19.14 1234.57,19.14 1264.57,19.14 1294.57,19.14 1324.57,19.14 1354.57,19.14 1384.57,19.14 1414.57,19.14 1444.57,19.14 1474.57,19.14 1504.57,19.14 1534.57,19.14 1564.57,19.14 1594.57,19.14 1624.57,19.14 1654.57,19.14 1684.57,19.14 1714.57,19.14 1744.57,19.14 1774.57,19.14 1804.57,19.14 1834.57,19.14 1864.57,19.14 1894.57,19.14 1924.57,19.14 1954.57,19.14 1984.57,19.14 2014.57,19.14 2044.57,19.14 2074.57,19.14 2104.57,19.14 2134.57,19.14 2164.57,19.14 2194.57,19.14 25.12,20.08 57.91,20.39 91.02,20.71 40.71,45.87 799.88,46.34 75.75,47.44 1189.45,47.2 109.57,49.14 139.57,49.14 169.57,49.14 199.57,49.14 289.57,49.14 499.57,49.14 589.57,49.14 889.57,49.14 999.84,49.29 1099.57,49.14 1399.57,49.14 1489.57,49.14 1699.57,49.14 1789.57,49.14 1999.57,49.14 2089.57,49.14 2209.57,49.14 2239.57,49.14 695,49.88 1590.55,68.27 1897.2,68.27 57.28,77.4 23.5,77.72 91.34,78.03 1689.61,78.19 2104.53,77.76 124.57,79.14 154.57,79.14 184.57,79.14 304.57,79.14 394.57,79.14 604.57,79.14 694.57,79.14 994.57,79.14 1204.57,79.14 1294.57,79.14 1504.57,79.14 1804.57,79.14 2194.57,79.14 2224.57,79.14 2254.57,79.14 496.73,83.54 2007.09,83.46 1095.04,90.24 777.24,93.43 807.72,93.62 212.99,94.57 970.55,95.2 1019.84,94.8 426.02,99.33 1731.89,99.21 322.05,100.04 259.29,101.14 354.33,100.79 111.38,106.81 49.57,109.14 79.57,109.14 469.57,109.14 529.57,109.14 559.57,109.14 2239.57,109.14 2269.57,109.14 2299.57,109.14 1714.17,124.02 1972.05,124.41 171.61,135.51 207.28,135.51 242.44,135.35 287.36,135.39 397.09,134.96 20.67,137.87 354.17,139.29 934.57,139.14 994.57,139.14 2104.57,139.14 2224.57,139.14 2254.57,139.14 2284.57,139.14 2314.57,139.14 63.35,140.12 501.54,140.2 1062.99,140.55 1253.54,143.31 1197.83,143.7 1225.98,143.7 592.13,149.61 312.4,156.5 2202.83,157.64 269.09,161.02 122.87,161.77 1647.24,163.58 377.01,164.72 195.79,166.54 229.02,166.61 40.08,167.2 2089.57,169.14 2119.57,169.14 2149.57,169.14 2239.57,169.14 2269.57,169.14 2299.57,169.14 2329.57,169.14 2359.57,169.14 84.65,174.53 1201.85,180.71 1952.13,182.28 800,185.43 827.95,185.24 1077.17,185.63 1107.28,185.43 1137.2,185.43 1926.38,187.6 1977.24,192.48 312.4,193.5 248.23,193.7 63.35,198.39 374.41,199.53 2134.57,199.14 2164.57,199.14 2254.57,199.14 2284.57,199.14 2314.57,199.14 2344.57,199.14 208.39,200.75 275.2,202.36 20.35,205.08 762.72,210.08 698.35,211.26 734.17,210.67 488.78,211.89 2046.26,215.55 522.4,216.34 558.82,216.34 592.83,216.34 625.87,216.54 1926.38,216.34 662.72,216.73 2370.08,218.11 1976.77,223.03 398.9,224.25 1949.84,223.74 327.05,225.63 360.83,228.27 2239.76,228.15 82.76,228.66 42.95,229.92 260.24,230.75 2273.23,232.09 229.45,234.17 2306.3,235.63 295.2,235.71 2339.76,235.83 733.54,239.61 1477.36,241.54 1926.38,243.7 1194.68,244.88 487.99,248.54 446.46,249.33 811.42,252.36 2375.59,254.13 2238.98,257.68 2264.17,257.68 214.57,259.14 273.35,259.45 304.57,259.14 905.12,258.66 87.01,260.24 363.27,259.68 415.28,259.68 2159.45,260.63 328.03,261.3 1851.77,261.22 835.63,263.58 21.61,263.98 235.98,266.93 559.84,266.77 2210.24,266.93 55.67,268.46 701.77,268.19 651.14,273.43 608.43,273.86 1835.83,276.77 2137.2,276.77 462.05,277.68 810.04,278.94 310.43,284.84 1914.8,284.96 409.8,286.18 2375.98,286.81 263.39,288.19 829.57,289.14 2029.57,289.14 2059.57,289.14 2089.57,289.14 536.14,291.26 939.96,290.94 981.5,291.34 1823.03,294.49 2156.69,295.47 216.06,295.71 67.8,297.44 580.71,297.32 676.26,297.13 2220.67,299.61 752.8,302.17 290.59,303.39 809.84,305.71 24.21,306.89 242.17,309.25 961.42,312.4 2043.74,312.28 916.54,312.99 2079.37,312.68 121.61,314.65 2375.98,316.73 88.27,319.02 143.9,326.54 59.45,327.36 1906.81,328.5 260.83,330.75 2234.25,330.91 1390.94,333.46 216.26,334.57 2151.77,334.25 939.17,335.24 2033.07,336.02 2062.95,336.02 2093.82,335.83 894.29,337.8 2270.28,341.34 2325,341.73 2204.53,345.08 139.57,349.14 2375.98,350.59 237.32,354.02 1896.69,353.94 2297.83,354.13 29.92,356.1 1412.99,356.69 915.35,358.27 2234.06,357.87 2138.98,359.45 2350,359.65 120.87,361.3 78.74,364.76 2270.28,368.31 1496.06,370.28 1524.41,370.47 1810.63,370.67 1856.34,371.26 144.96,374.8 2331.1,376.18 594.76,376.89 711.1,377.01 55.32,379.13 893.7,380.71 2234.06,384.84 2373.03,386.61 1832.4,389.45 2302.95,389.96 1762.32,391.54 768.39,402.6 1800.71,401.93 137.8,403.54 1679.53,403.35 2278.35,402.76 1585.43,404.33 1617.32,403.74 24.17,405.39 1855.35,405.91 738.03,409.09 2329.57,409.14 2359.57,409.14 2233.86,413.39 2161.22,418.31 2209.37,418.15 166.65,422.83 1827.24,422.72 708.54,424.57 2296.85,426.38 2058.46,429.53 2083.27,429.33 2256.89,429.13 124.37,436.3 224.57,435.83 737.99,439.57 2314.57,439.14 2344.57,439.14 2372.64,439.17 1201.57,440.35 1586.61,444.09 1545.47,444.68 1626.57,451.22 2155.12,451.38 1727.32,451.81 2033.86,451.97 559.06,453.03 151.93,454.8 2262.6,457.28 2298.23,457.28 2093.82,459.33 2062.13,461.89 1566.34,464.57 1677.24,465.67 229.57,469.14 2329.57,469.14 2359.57,469.14 1603.74,473.62 1628.15,478.5 709.88,483.58 1544.49,484.45 33.46,487.44 2262.4,488.39 2298.03,488.58 1677.05,489.21 2094.41,490.59 2039.17,490.75 2066.1,491.18 2155.12,491.54 169.68,491.89 744.88,491.93 817.52,491.93 2375.39,494.49 75.55,496.73 214.57,499.14 2344.57,499.14 1778.54,502.36 108.54,502.83 1573.43,504.53 1603.54,504.53 1631.89,504.53 1721.06,505.51 2262.2,518.9 2298.03,519.09 2326.18,518.7 230.43,523.07 1677.64,523.23 1801.93,525.43 169.57,529.14 2372.83,531.89 70.51,533.58 26.57,534.41 1543.31,536.61 1573.23,536.22 1603.54,536.22 1632.09,536.02 1750,536.22 109.96,539.88 1658.03,542.05 1824.29,547.17 2353.94,547.64 2261.81,548.23 2297.83,547.83 2325.98,547.83 1349.61,552.36 184.57,559.14 2044.57,559.14 2074.57,559.14 1370.08,567.52 1632.09,569.49 1662.01,569.29 1691.1,569.13 1777.95,569.49 1542.72,569.68 1573.23,569.68 1603.35,569.88 2372.64,569.68 1720,571.54 2154.17,570.75 1211.81,572.05 22.32,574.29 63.23,574.88 708.86,577.64 828.15,578.54 132.6,579.17 169.57,589.14 199.57,589.14 229.57,589.14 1806.06,591.5 2272.64,591.93 743.58,595.55 1647.24,599.41 1676.18,599.61 1705.32,599.61 1735.04,599.61 1560.04,600 1588.58,600 1617.13,600 2164.84,600.04 804.33,603.54 2093.23,604.37 2138.74,606.14 114.72,611.46 28.94,613.98 2254.57,619.14 75.12,620.67 709.57,623.7 736.57,624.17 764.96,624.57 2074.41,628.5 1603.15,629.53 1690.94,629.53 1720.28,629.53 1749.41,629.33 1777.17,629.29 148.43,629.72 1542.91,630.51 1573.62,629.92 1631.89,629.92 1662.01,629.72 827.95,632.28 1357.28,632.09 889.96,632.68 1809.45,635.43 99.8,646.65 2269.57,649.14 2122.05,652.17 61.02,653.54 1560.04,655.32 1588.58,655.51 1617.13,655.71 1647.05,655.91 1676.18,655.91 1705.32,655.91 1734.65,656.1 1763.39,656.1 1790.75,656.3 24.02,658.27 799.29,662.64 889.96,663.58 2074.72,667.4 2190.16,669.09 486.77,671.46 434.96,672.09 610.63,672.44 549.61,673.23 230.63,676.14 184.57,679.14 304.57,679.14 514.57,679.14 724.57,679.14 754.57,679.14 2046.1,678.7 2134.57,679.14 2254.57,679.14 782.76,682.44 819.29,682.76 651.97,684.72 88.39,685.83 31.5,694.68 2018.7,695.2 2055.71,697.2 618.78,701.65 835.04,702.36 710.08,704.68 740.16,704.92 769.29,704.72 798.62,705.51 302.52,708.11 169.57,709.14 199.57,709.14 229.57,709.14 332.87,708.94 499.57,709.14 529.57,709.14 2269.57,709.14 64.17,709.84 853.15,719.88 1678.94,730.12 2019.41,732.2 2060.35,732.4 1519.49,733.46 1549.41,733.27 1580.51,733.46 1611.42,732.68 1642.32,733.27 610.04,734.45 38.82,736.57 871.85,737.99 214.57,739.14 304.57,739.14 514.57,739.14 544.57,739.14 2164.57,739.14 2254.57,739.14 181.02,739.68 664.13,740.12 2114.57,740.16 336.14,740.91 1310.75,745.47 370.16,746.38 2039.76,752.8 582.13,754.09 890.43,754.17 1291.26,759.13 1331.02,759.61 1416.22,759.61 705.32,763.58 632.95,764.41 2141.54,765.16 351.5,767.64 203.5,768.46 53.15,769.29 319.57,769.14 739.57,769.14 769.57,769.14 799.57,769.14 2089.57,769.14 2269.57,769.14 906.89,771.26 672.01,775.55 606.22,775.94 2026.34,778.11 377.44,783.43 230.24,790.12 28.94,799.61 2254.57,799.14 346.06,800.63 2081.5,801.57 202.52,803.66 2219.65,805.04 2030.08,807.2 2135.35,808.9 72.24,811.73 435.12,812.4 230.04,827.56 2119.57,829.14 2149.57,829.14 2179.57,829.14 2269.57,829.14 377.24,830.59 501.54,832.01 294.41,833.23 46.14,835.59 2081.89,835.24 2029.09,836.1 539.41,840.12 990.35,856.1 833.43,857.09 886.85,857.09 1643.11,857.28 304.57,859.14 664.57,859.14 694.57,859.14 724.57,859.14 754.57,859.14 784.57,859.14 2134.57,859.14 2164.57,859.14 2254.57,859.14 519.57,862.6 79.88,865.55 2082.28,864.96 24.8,872.56 858.98,872.32 914.06,872.32 331.46,873.11 488.19,873.35 550.75,872.72 808.7,873.11 1008.66,873.23 1903.74,875.2 2003.54,876.18 1823.43,880.32 1871.65,882.87 109.57,889.14 169.57,889.14 199.57,889.14 2029.57,889.14 2179.57,889.14 2269.57,889.14 2241.18,891.02 230.94,896.61 60.79,897.05 1987.8,904.33 1595.67,907.28 124.57,919.14 154.57,919.14 184.57,919.14 214.57,919.14 1624.57,919.14 1654.57,919.14 1684.57,919.14 2014.57,919.14 2164.57,919.14 2224.57,919.14 2254.57,919.14 89.13,919.68 2345.28,920.28 304.65,921.42 337.24,921.3 370.32,921.26 2286.22,921.26 2315.94,920.87 28.62,921.89 869.21,923.35 915.79,923.54 1063.58,924.61 1575.79,925.59 1965.75,925 2118.11,926.57 2377.17,928.54 1300.59,929.53 1217.91,929.92 1273.82,929.72 1377.17,929.92 1419.68,930.12 1489.49,936.69 1885.83,941.57 692.32,941.93 985.24,941.97 402.36,943.31 1595.47,942.72 1791.02,943.15 61.1,944.21 791.26,947.13 109.57,949.14 139.57,949.14 169.57,949.14 199.57,949.14 499.57,949.14 589.57,949.14 889.57,949.14 1099.57,949.14 1189.57,949.14 1399.57,949.14 1999.57,949.14 2089.57,949.14 2209.57,949.14 2239.57,949.14 2269.57,949.14 2299.57,949.14 2329.57,949.14 2359.57,949.14 2376.97,972.44 1294.53,973.43 389.76,976.38 603.19,976.57 1001.81,976.18 1801.34,976.02 1902.83,976.02 1202.91,977.01 1394.06,977.6 2105.28,976.81 28.31,977.95 491.02,977.8 703.39,977.8 787.6,977.8 903.82,977.8 1499.13,978.31 1595.83,977.91 1703.74,977.8 2005.16,977.8 124.57,979.14 154.57,979.14 184.57,979.14 2194.57,979.14 2224.57,979.14 2254.57,979.14 2284.57,979.14 2314.57,979.14 2344.57,979.14 83.7,985.91 288.35,994.61 218.5,1002.91 2139.06,1003.9 347.48,1008.58 447.09,1008.58 547.09,1008.58 747.32,1008.58 1046.97,1008.58 1147.8,1008.58 1447.64,1008.58 1547.24,1008.58 1947.72,1008.58 647.13,1008.98 847.32,1008.98 947.17,1008.78 1247.6,1008.98 1347.01,1008.78 1647.05,1008.78 1747.28,1008.78 1846.3,1008.78 2047.13,1008.78
  other v4: 1612.01,85.04 915.35,90.35 1583.46,90.35 1399.41,98.23 869.09,99.41 1924.8,99.41 1162.8,100.59 1759.65,100.39 1307.68,102.56 620.47,104.13 1358.86,103.94 1848.62,106.3 698.23,107.28 1110.63,107.48 1800.79,106.69 2145.87,108.27 1261.61,110.43 2063.98,110.63 502.17,111.61 1506.5,112.6 1211.02,112.8 1067.91,116.14 1416.34,120.87 1385.04,122.44 1318.9,125.39 872.64,126.77 961.61,127.56 1487.2,127.56 1174.21,127.95 1356.89,128.74 1530.32,131.1 423.03,132.68 846.65,134.45 1088.39,139.37 543.86,141.85 1032.48,142.91 909.45,144.09 2038.58,143.9 2166.54,144.88 1736.61,145.87 1960.43,146.06 1702.17,148.62 1812.8,150.59 1846.85,149.8 709.84,157.48 963.19,157.48 742.32,159.45 794.29,159.25 1385.24,159.25 1425.79,160.04 1292.72,162.2 840.94,163.78 1177.56,165.35 466.73,166.34 1981.3,167.52 1031.1,168.31 1717.32,168.7 1870.67,168.7 1831.1,172.05 1460.43,176.38 416.69,177.05 1502.17,177.95 1541.14,177.76 1775.59,177.76 2050.98,177.76 1682.87,181.69 159.8,186.93 899.21,199.41 1478.15,199.21 1517.91,199.61 954.53,200.59 981.69,200.39 1010.83,200.59 1062.01,200 1558.86,200.2 1651.97,203.15 1155.71,203.94 1861.02,205.32 1685.63,206.5 1297.32,207.24 443.03,208.66 1210.24,210.04 2080.12,210.63 831.89,220.47 159.65,229.33 1157.68,228.94 2206.69,234.25 1664.17,236.02 1998.23,235.83 773.43,238.39 581.93,245.91 676.65,245.91 1778.35,246.46 2073.03,246.46 628.46,246.69 527.24,250.35 1737.99,252.76 145.83,262.91 1242.52,265.94 1151.38,266.93 1275.79,267.32 1304.92,266.73 1334.25,267.32 1517.72,278.54 1767.95,279.72 1562.01,282.87 2001.97,285.24 169.29,289.37 1359.25,292.72 1437.99,296.65 1669.88,302.17 484.33,304.02 389.76,305.24 1792.4,305.16 872.83,307.87 1308.66,307.87 1925.39,309.45 1244.09,310.04 1277.56,309.65 1152.56,311.22 1726.85,315.04 1765.16,316.73 1843.31,320.28 1468.11,327.36 1566.54,330.91 1991.54,335.63 1260.83,337.01 1299.02,337.6 1803.7,339.41 861.61,339.96 1367.52,340.16 1753.27,340.16 1437.99,342.32 1335.83,345.67 1192.13,351.18 1283.27,364.96 1150.2,366.14 1246.06,366.34 1216.54,367.52 1464.96,367.72 1319.49,368.9 1370.08,369.68 1748.43,373.03 435.28,377.05 469.92,378.15 508.35,378.15 1966.14,384.45 2159.06,389.17 1346.46,390.16 1884.65,391.06 800.59,392.32 1443.31,391.93 1546.26,394.29 2037.99,393.9 1503.15,395.47 1927.95,395 99.65,397.76 263.23,398.54 1243.9,398.23 364.06,402.4 486.02,403.94 1321.06,405.91 1157.28,410.83 876.77,412.01 837.2,413.19 577.64,416.57 454.13,417.13 517.13,422.44 1367.52,422.44 1698.23,423.03 1603.15,424.8 68.46,426.89 949.02,426.77 1434.25,426.97 806.3,428.74 1878.11,430.43 1806.5,432.28 1342.32,433.27 281.06,436.22 1303.35,436.02 1150.2,436.81 1463.19,442.52 1936.42,445.28 607.83,447.01 646.69,447.01 1112.8,448.43 1253.94,449.02 1970.47,449.61 29.61,451.61 328.82,452.4 2194.88,451.97 490.47,454.61 794.29,454.13 1900.87,454.57 452.44,457.09 848.82,459.45 1372.24,461.81 899.41,462.99 1436.22,463.98 112.2,465.35 959.65,465.55 1302.36,465.35 1022.24,465.94 260.83,468.19 1339.37,469.09 2223.43,470.28 1271.65,473.43 1501.57,473.03 775.98,475.39 1927.17,479.29 2127.76,480.32 530.51,482.87 1862.68,485.63 1417.32,488.58 491.73,489.17 1461.02,489.17 2197.83,488.78 646.06,490.39 453.27,491.42 608.66,490.98 1202.36,491.93 142.99,512.32 514.37,527.95 273.78,532.6 545.35,532.48 490.35,549.41 2204.92,550.79 327.64,553.62 452.83,556.57 2280.12,567.13 2229.92,570.87 1512.99,571.65 280.67,573.07 1397.83,573.62 508.31,574.61 1248.62,574.21 1459.65,574.8 1282.87,575.79 627.56,577.83 2339.76,578.35 1332.28,578.74 358.58,580.35 395.04,584.21 1432.28,591.93 1867.13,591.93 1303.35,594.49 904.13,598.62 2007.87,598.23 1370.67,599.8 1528.94,599.8 1235.24,601.77 1932.52,602.99 2220.67,603.54 942.32,606.3 1170.47,605.71 1496.85,606.3 1409.45,607.87 471.69,609.13 1462.8,609.45 1267.32,609.65 1331.89,611.61 1132.09,612.01 519.88,613.39 1001.57,615.16 1068.31,614.76 257.17,618.43 605.79,623.58 638.07,623.39 414.21,625 451.69,624.8 492.28,624.65 571.85,625 1303.54,625.59 2203.35,627.56 1216.73,629.53 2146.26,630.32 2100.59,634.06 854.13,634.65 1164.76,639.17 1259.25,640.35 278.82,640.91 2240.16,642.32 784.61,643.58 1833.46,644.49 1895.32,645.55 1131.1,646.26 1285.43,651.77 1323.62,652.36 1020.87,653.94 1405.91,654.13 1443.5,653.94 837.01,659.45 1208.07,659.25 147.4,659.8 1513.58,660.63 1364.76,662.2 1242.91,662.99 945.67,674.8 1055.32,675.39 860.43,675.79 2216.14,677.36 2164.76,678.54 992.52,678.74 1834.06,682.68 1879.13,687.01 463.27,693.94 401.1,695.79 122.56,697.4 911.42,702.36 956.5,704.92 1910.24,706.3 2234.06,707.48 2113.78,708.66 266.89,711.57 1938.78,719.09 427.24,724.53 1872.44,724.8 2140.55,727.95 2191.34,730.32 1248.62,735.43 98.98,736.26 397.28,736.06 1433.66,739.37 1468.11,739.57 1395.47,740.55 640.16,742.13 1173.43,742.91 1351.97,744.29 1730.12,747.24 1497.83,749.02 2227.56,750.2 1203.54,750.79 1630.91,752.36 1602.76,758.07 1267.72,759.65 1534.84,760.24 1572.05,761.02 1769.68,763.78 2166.73,764.37 147.4,765.55 1876.57,767.13 1374.61,768.31 88.78,768.9 430.87,772.09 2200.98,775.79 122.44,798.43 165.43,801.85 2054.33,801.97 1869.29,803.74 1975.98,804.53 2189.76,804.92 1942.52,831.89 1857.28,837.2 162.99,840.39 116.81,850.24 2219.09,855.91 577.95,864.17 441.02,870.94 630.16,872.24 1331.06,872.56 1370.24,872.24 1277.87,873.19 1222.8,873.82 1929.92,877.36 2110.43,883.07 1534.25,885.59 1457.17,885.91 1850.79,895.08 1907.28,900.2 1498.58,903.11 1876.97,905.71 1824.8,907.68 2084.06,917.13 1753.15,917.91 442.91,919.49 509.17,919.37 573.15,919.06 719.02,920.63 822.52,920.63 769.33,920.94 1008.31,920.94
"GPIO0 / I2S_SDI": J1.32 U1.16 U4.1 | length 1581.9
  Top Layer w4: v2(1556.89,426.18) 1557.68,426.97 1794.88,426.97 1806.69,438.78 1806.69,470.67 1850,513.98 U1.16@1876.97,513.98
  Mid Layer 1 w4: v4(1509.06,436.02) 1518.9,426.18 v2(1556.89,426.18)
  Mid Layer 2 w4: v1(899.41,485.24) 1161.22,485.24 ; J1.32@1046.85,61.81 1046.85,70.47 1174.02,197.64 1174.02,472.44 1161.22,485.24 ; v1(1161.22,502.36) 1161.22,485.24 ; v1(1492.72,440.35) 1495.89,437.18 1507.9,437.18 v4(1509.06,436.02)
  Bottom Layer w4: U4.1@899.41,472.83 v1(899.41,485.24) ; v1(1161.22,502.36) 1193.9,502.36 1202.1,510.56 1400.56,510.56 1470.76,440.35 v1(1492.72,440.35)
"GPIO14 / MDI_TP_P1": J1.24 U1.40 U4.8 | length 1949
  Top Layer w4: v2(1850,807.48) 1856.3,801.18 U1.40@1856.3,786.81
  Mid Layer 1 w4: v4(1805.71,765.16) 1805.71,790.71 1793,803.43 1793,820.17 1806.59,833.76 1835.82,833.76 1847.05,822.54 1847.05,810.43 v2(1850,807.48)
  Mid Layer 2 w4: v1(1049.21,708.27) 1050.37,709.43 1781.89,709.43 1804.4,731.94 1804.4,763.85 v4(1805.71,765.16) ; v1(1793.9,739.96) 1803.81,739.96 ; J1.24@1846.85,61.81 1863.39,61.81 1889.96,88.39 v1(1889.96,204.53)
  Bottom Layer w4: U4.8@1037.2,485.24 1037.2,497.44 1048.89,509.13 v1@1048.89,708.27 ; v1(1793.9,739.96) 1793.9,674.29 1872.8,595.39 1872.8,291.28 1893.38,270.7 1893.38,208.93 1889.96,205.52 v1(1889.96,204.53)
"GPIO15 / MDI_TN_P1": J1.23 U1.42 U4.9 | length 1921.1
  Top Layer w4: v2(1827.95,814.76) 1836.61,806.1 U1.42@1836.61,786.81
  Mid Layer 1 w4: v2(1827.95,814.76) 1827.95,769.68 v4(1842.72,754.92)
  Mid Layer 2 w4: v1(1060.04,698.43) 1063.04,701.43 1785.2,701.43 1812.4,728.62 1812.4,748.43 1818.9,754.92 v4(1842.72,754.92) v4@1843.12,754.92 ; 1826.57,755.32 v1(1826.57,764.37) ; v1(1904.33,204.33) 1904.33,88.78 1931.3,61.81 J1.23@1946.85,61.81
  Bottom Layer w4: U4.9@1056.89,485.24 1056.89,695.28 v1(1060.04,698.43) ; v1(1826.57,764.37) 1826.57,755.83 1801.9,731.15 1801.9,677.61 1880.91,598.6 1880.91,294.49 1901.38,274.02 1901.38,207.28 v1(1904.33,204.33)